# EAGLE board HAM Breadboard (EAGLE 9.7.0)

Size 197.81 x 160.1 mm. Coordinates in mm from the lower left corner, seen from the top.
Outline: 0,0 197.81,0 197.81,160.1 0,160.1 0,0
Copper layers (1*16): Top 0.035mm / dielectric 1.5mm / Bottom 0.035mm
Design rules "default": minimum track width 6mil, minimum drill 0.35mm, track to track 6mil, track to pad 6mil, pad to pad 6mil, via to via 6mil, smd to smd 6mil, copper to edge 40mil, drill to drill 6mil, minimum pad ring 10mil, minimum via ring 8mil, stop-mask expansion 4mil, vias tented up to drill 0mil, thermal gap 10mil

## Footprints (pad centres in the part's own frame; a part is rotated, then mirrored left to right if it is on the bottom)
BATTERY-GENERIC = drill 1.118 pad 3.15 octagon: + 2.54,0; - -2.54,0
1X08 = drill 1.016 long: 1 -8.89,0; 2 -6.35,0; 3 -3.81,0; 4 -1.27,0; 5 1.27,0; 6 3.81,0; 7 6.35,0; 8 8.89,0
RESAD1016W63L850D250B = drill 0.83 pad 1.43: 1 -5.08,0; 2 5.08,0
HA-06-SM065 = drill 1 pad 1.676: 1 -2.54,-2.54; 2 0,2.54; 3 2.54,-2.54
TO220BV = drill 1.016 long: D 0,-2.54; G -2.54,-2.54; S 2.54,-2.54
DIP826W53P254L959H508Q8B = drill 0.786 pad 1.386: 1 -4.13,3.81; 2 -4.13,1.27; 3 -4.13,-1.27; 4 -4.13,-3.81; 5 4.13,-3.81; 6 4.13,-1.27; 7 4.13,1.27; 8 4.13,3.81
TO92 = drill 0.813 octagon: 1 -1.27,0; 2 0,1.905; 3 1.27,0
ARDUINO-UNO-R3-SHIELD = drill 1.016 pad 1.88: 3.3V 24.13,-2.54; 5V 24.13,0; A0 24.13,12.7; A1 24.13,15.24; A2 24.13,17.78; A3 24.13,20.32; A4 24.13,22.86; A5 24.13,25.4; AREF -24.13,-13.97; D2 -24.13,20.32; D3 -24.13,17.78; D4 -24.13,15.24; D5 -24.13,12.7; D6 -24.13,10.16; D7 -24.13,7.62; D8 -24.13,3.81; D9 -24.13,1.27; D10 -24.13,-1.27; D11 -24.13,-3.81; D12 -24.13,-6.35; D13 -24.13,-8.89; GND@0 24.13,2.54; GND@1 24.13,5.08; GND@2 -24.13,-11.43; IOREF 24.13,-7.62; NC 24.13,-10.16; RES 24.13,-5.08; RX -24.13,25.4; SCL -24.13,-19.05; SDA -24.13,-16.51; TX -24.13,22.86; VIN 24.13,7.62
TSOP48 = drill 0.8: 1 -2.54,0; 2 0,0; 3 2.54,0

## Placement (x,y rotation side)
BATDC_TO_DC_POWER_OUTPUT  9V  [BATTERY-GENERIC]  159.8,151.85 270 top
JPDC_L_+  PINHD-1X08_1X08M  [1X08]  153.31,93.48 270 top
JPDC_L_-  PINHD-1X08_1X08M  [1X08]  135.52,95.38 270 top
JPDC_R_+  PINHD-1X08_1X08M  [1X08]  176.72,94.19 270 top
JPDC_R_-  PINHD-1X08_1X08M  [1X08]  158.94,94.19 270 top
R1  3900  [RESAD1016W63L850D250B]  191.48,51.3 90 top
R2  12000  [RESAD1016W63L850D250B]  71.03,140.58 90 top
R3  8200  [RESAD1016W63L850D250B]  116.88,16.59 90 top
R4  1500  [RESAD1016W63L850D250B]  115.49,93.69 90 top
R5  3300  [RESAD1016W63L850D250B]  124.51,8.97 90 top
R6  1500  [RESAD1016W63L850D250B]  111.17,96.87 90 top
R7  8200  [RESAD1016W63L850D250B]  93.8,94.75 90 top
RPOT1  10k  [HA-06-SM065]  124.01,62.2 0 top
RPOT2  10k  [HA-06-SM065]  111.31,62.2 0 top
TIRF9540N  PMOSFET  [TO220BV]  118.93,41.88 180 top
U10K_POT_DS1809-010  OPAMP_DIP  [DIP826W53P254L959H508Q8B]  68.57,106.91 90 top
UCAMERA_TM136H  TMP36GT9Z_TO92  [TO92]  124.01,64.74 0 top
UMEGA_2560  ARDUINO-UNO-R3-SHIELD  [ARDUINO-UNO-R3-SHIELD]  47.88,35.66 270 top
UVIDEOLYNX_FAN  IR-RECEIVERTSOP48  [TSOP48]  124.51,112.12 0 top
UVIDEOLYNX_TM136H  TMP36GT9Z_TO92  [TO92]  111.31,64.74 0 top
UWEIRD_3_WIRE_THING_(ASK_LARRY)  TMP36GT9Z_TO92  [TO92]  159.73,9.33 0 top

## Library data of the parts
BATDC_TO_DC_POWER_OUTPUT JPDC_L_+ JPDC_L_- JPDC_R_+ JPDC_R_- R1-R7 RPOT1 RPOT2 U10K_POT_DS1809-010 UCAMERA_TM136H UMEGA_2560 UVIDEOLYNX_FAN UVIDEOLYNX_TM136H UWEIRD_3_WIRE_THING_(ASK_LARRY) = Tinkercad
TIRF9540N = Tinkercad; CATEGORY: Transistor; SUB-CATEGORY: MOSFET; TYPE: P-Channel

## Nets
BATDC_TO_DC_POWER_OUTPUT+: BATDC_TO_DC_POWER_OUTPUT.+ JPDC_L_+.1 JPDC_R_+.1 R1.2 UMEGA_2560.A2
BATDC_TO_DC_POWER_OUTPUT-: BATDC_TO_DC_POWER_OUTPUT.- JPDC_L_-.1 JPDC_R_+.8 JPDC_R_-.1 JPDC_R_-.8 R1.1 R2.1 R4.2 U10K_POT_DS1809-010.3 U10K_POT_DS1809-010.4 U10K_POT_DS1809-010.5 UMEGA_2560.GND@0 UMEGA_2560.GND@1 UMEGA_2560.GND@2 UWEIRD_3_WIRE_THING_(ASK_LARRY).1
TIRF9540N_S: JPDC_L_+.8 R3.2 TIRF9540N.S
U10K_POT_DS1809-010_OUT: R2.2 U10K_POT_DS1809-010.6
UCAMERA_TM136H_GND: RPOT1.3 UCAMERA_TM136H.1
UCAMERA_TM136H_VOUT: RPOT1.2 UCAMERA_TM136H.2
UMEGA_2560_A0: R4.1 RPOT1.1 UCAMERA_TM136H.3 UMEGA_2560.A0
UMEGA_2560_A1: R6.1 RPOT2.1 UMEGA_2560.A1 UVIDEOLYNX_TM136H.3
UMEGA_2560_D11: R5.1 UMEGA_2560.D11
UMEGA_2560_D12: U10K_POT_DS1809-010.7 UMEGA_2560.D12
UMEGA_2560_D13: U10K_POT_DS1809-010.2 UMEGA_2560.D13
UVIDEOLYNX_FAN_GND: JPDC_L_-.8 R7.1 UVIDEOLYNX_FAN.2
UVIDEOLYNX_FAN_VCC: R7.2 UVIDEOLYNX_FAN.3
UVIDEOLYNX_TM136H_GND: RPOT2.3 UVIDEOLYNX_TM136H.1
UVIDEOLYNX_TM136H_VOUT: RPOT2.2 UVIDEOLYNX_TM136H.2
UWEIRD_3_WIRE_THING_(ASK_LARRY)_+VS: R3.1 TIRF9540N.G UWEIRD_3_WIRE_THING_(ASK_LARRY).3
UWEIRD_3_WIRE_THING_(ASK_LARRY)_VOUT: R5.2 UWEIRD_3_WIRE_THING_(ASK_LARRY).2

## Tracks (layer width: path | path; a pad name or v marks a point on that pad's centre or on a via)
BATDC_TO_DC_POWER_OUTPUT+  (4 unrouted)
BATDC_TO_DC_POWER_OUTPUT-  (14 unrouted)
TIRF9540N_S  (2 unrouted)
U10K_POT_DS1809-010_OUT  (1 unrouted)
UCAMERA_TM136H_GND  (1 unrouted)
UCAMERA_TM136H_VOUT  (1 unrouted)
UMEGA_2560_A0  (3 unrouted)
UMEGA_2560_A1  (3 unrouted)
UMEGA_2560_D11  (1 unrouted)
UMEGA_2560_D12  (1 unrouted)
UMEGA_2560_D13  (1 unrouted)
UVIDEOLYNX_FAN_GND  (2 unrouted)
UVIDEOLYNX_FAN_VCC  (1 unrouted)
UVIDEOLYNX_TM136H_GND  (1 unrouted)
UVIDEOLYNX_TM136H_VOUT  (1 unrouted)
UWEIRD_3_WIRE_THING_(ASK_LARRY)_+VS  (2 unrouted)
UWEIRD_3_WIRE_THING_(ASK_LARRY)_VOUT  (1 unrouted)